# Altium PCB Estacion_Meteorologica_Feather _M0.PcbDoc
Units mil, origin at the board's own origin, x right, y up, seen from the top; angles counter-clockwise.
Board outline 2283.46 x 2987.13 mil, 4 copper layers (Top Layer, GND, VCC, Bottom Layer), stack 62.639 mil thick; 57 components, 92 nets, 233 pads, 182 vias.
Unrouted connection lines stored in the file: 1.
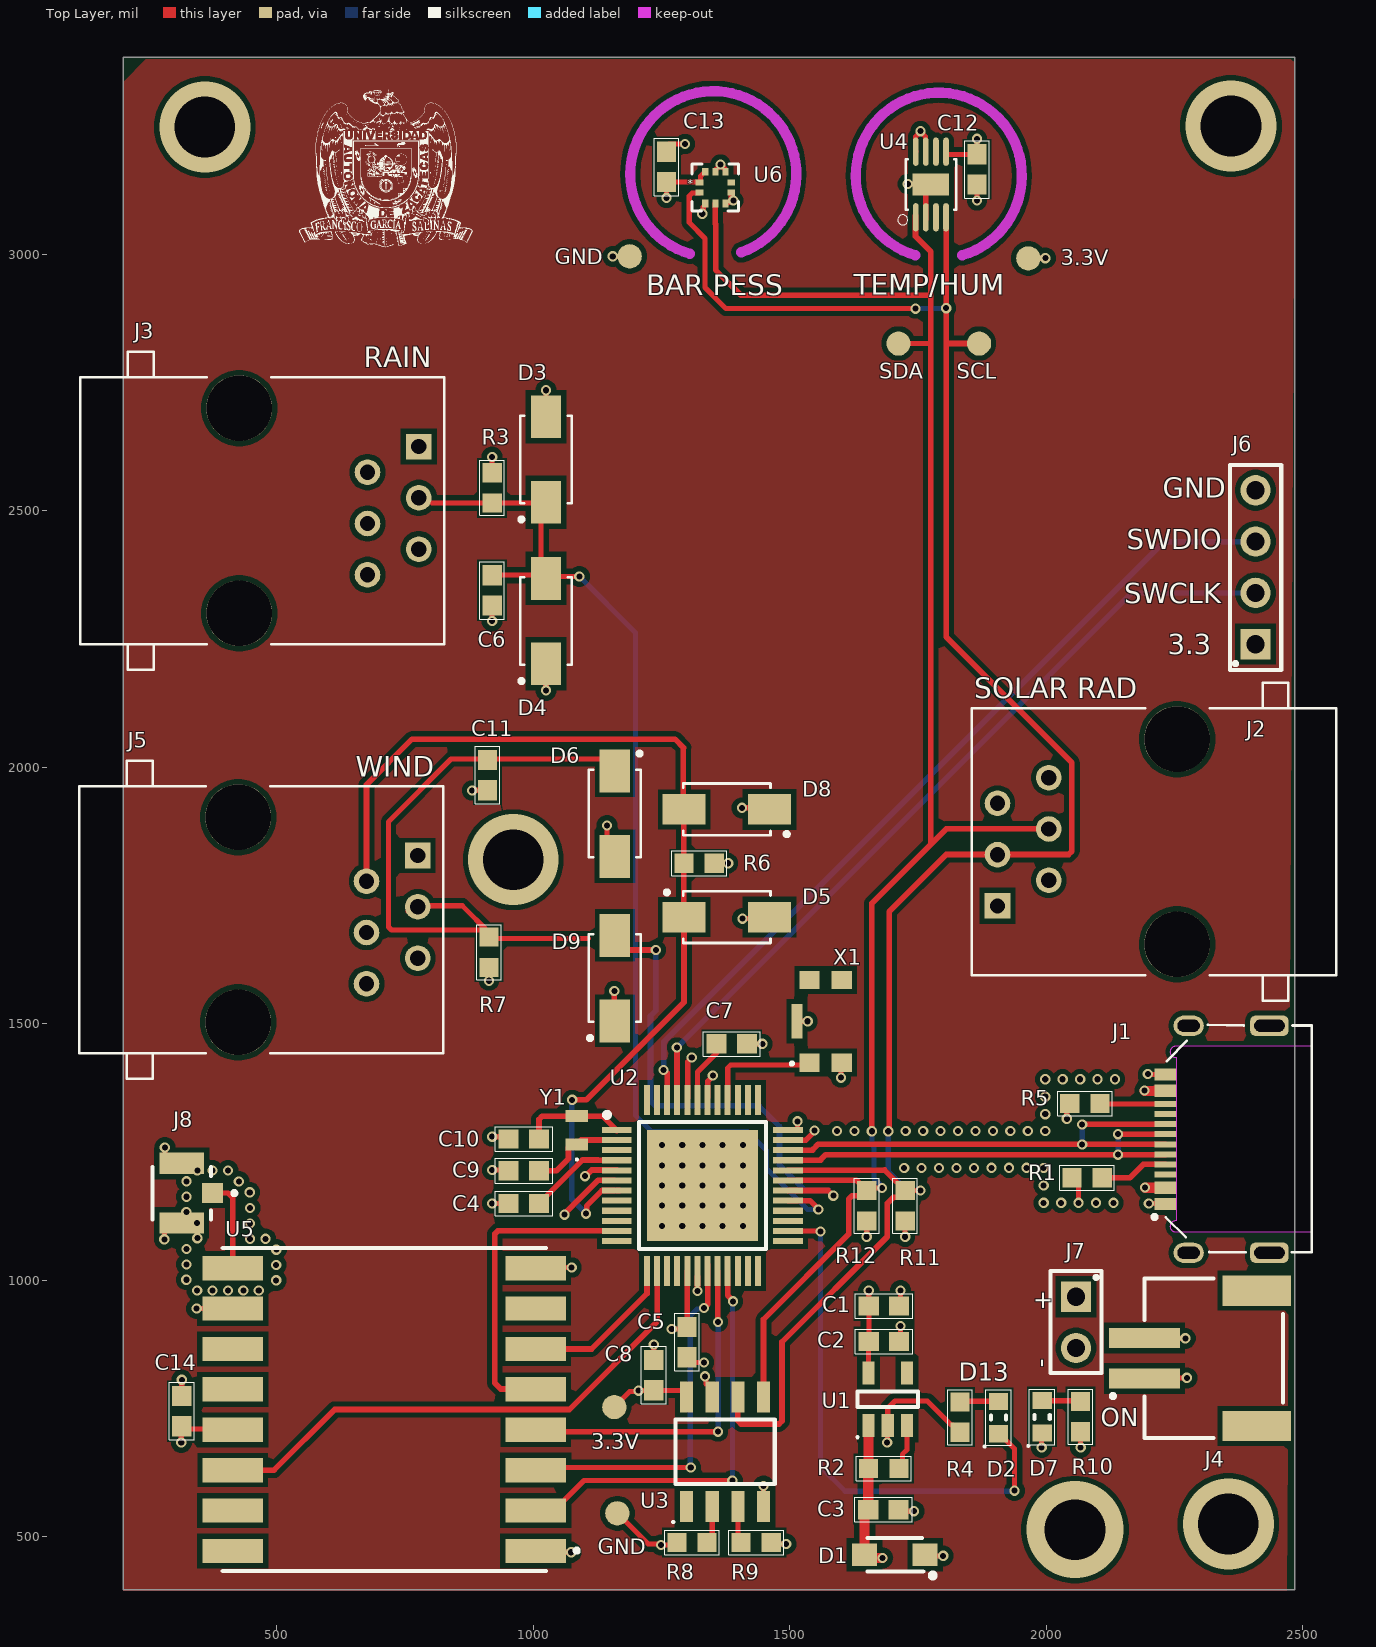
[diagram p0: Top Layer view]
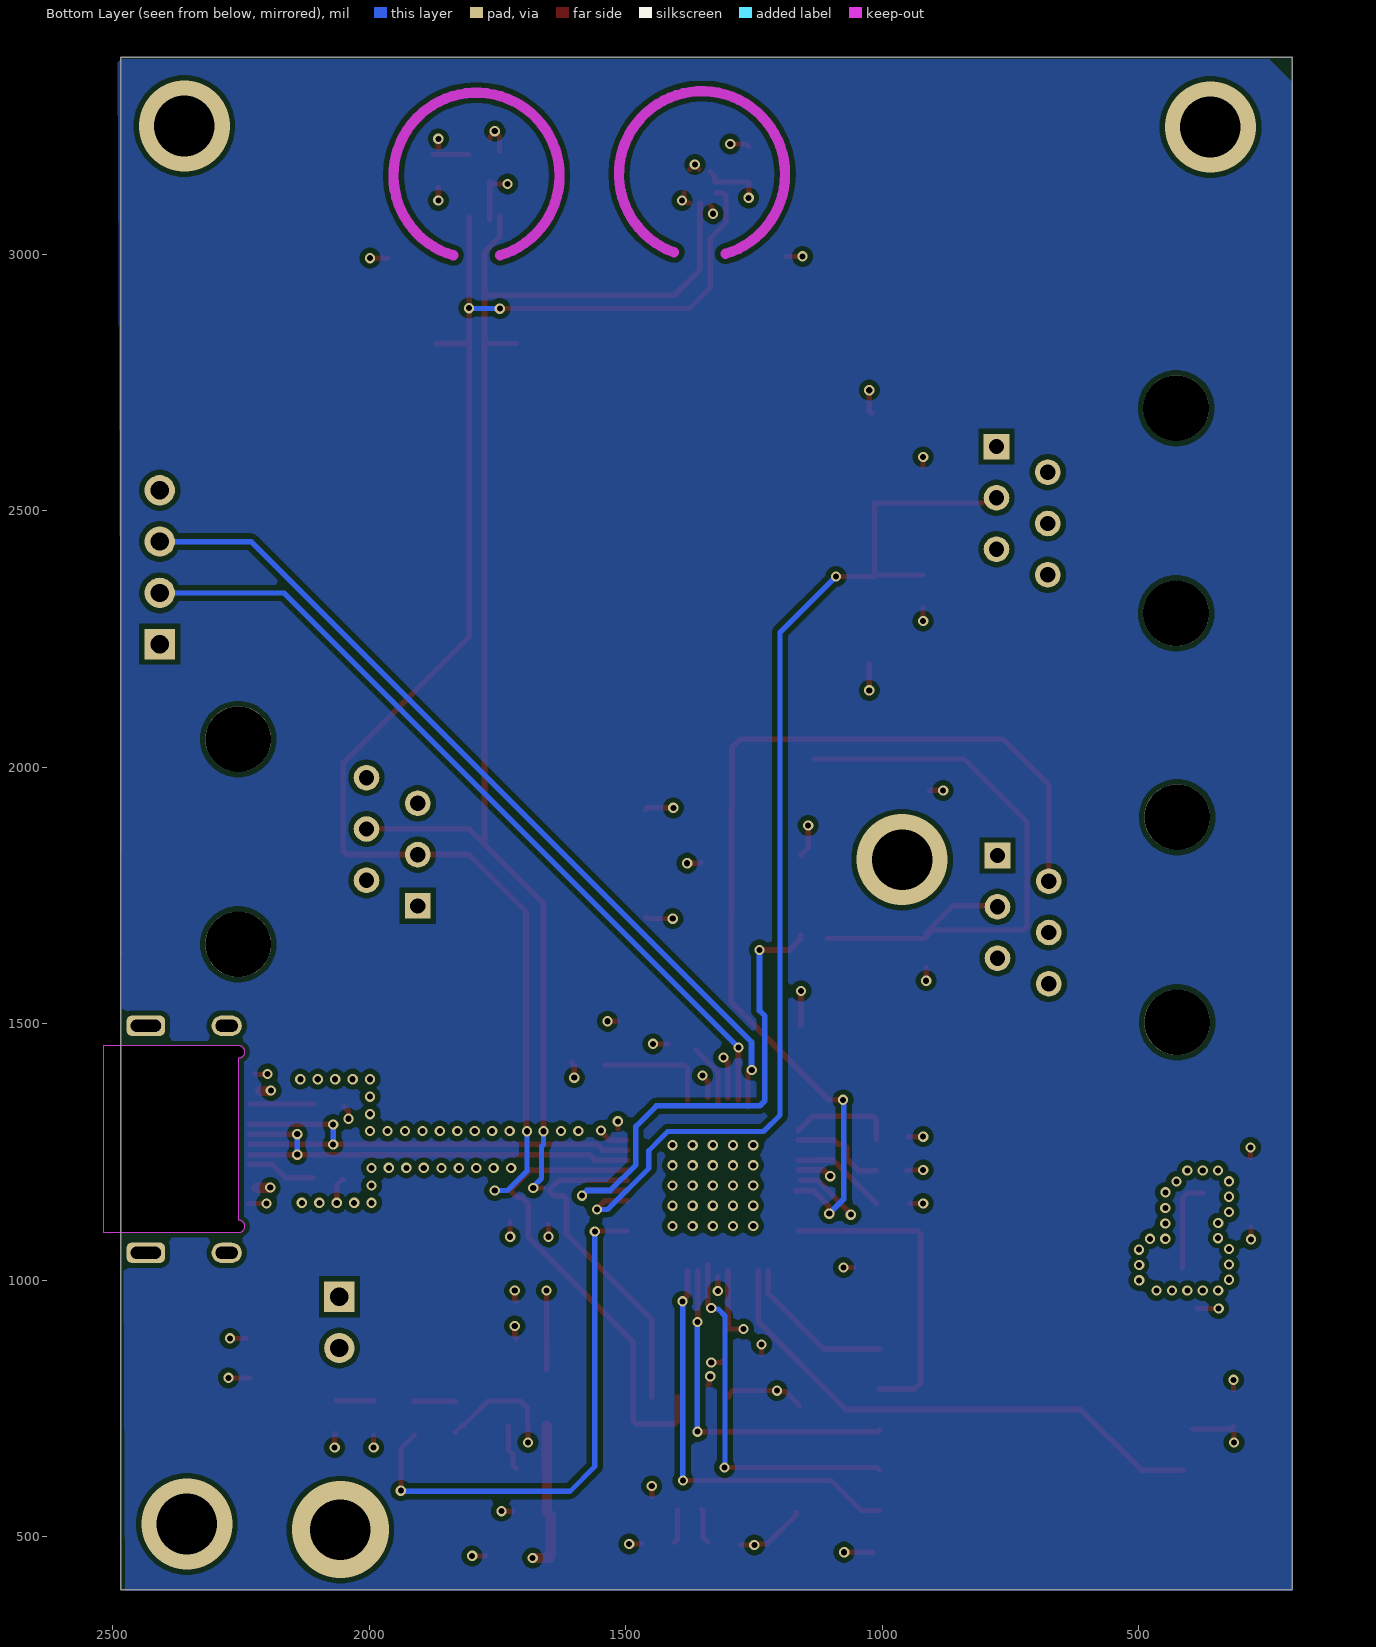
[diagram p1: Bottom Layer view, seen from below]
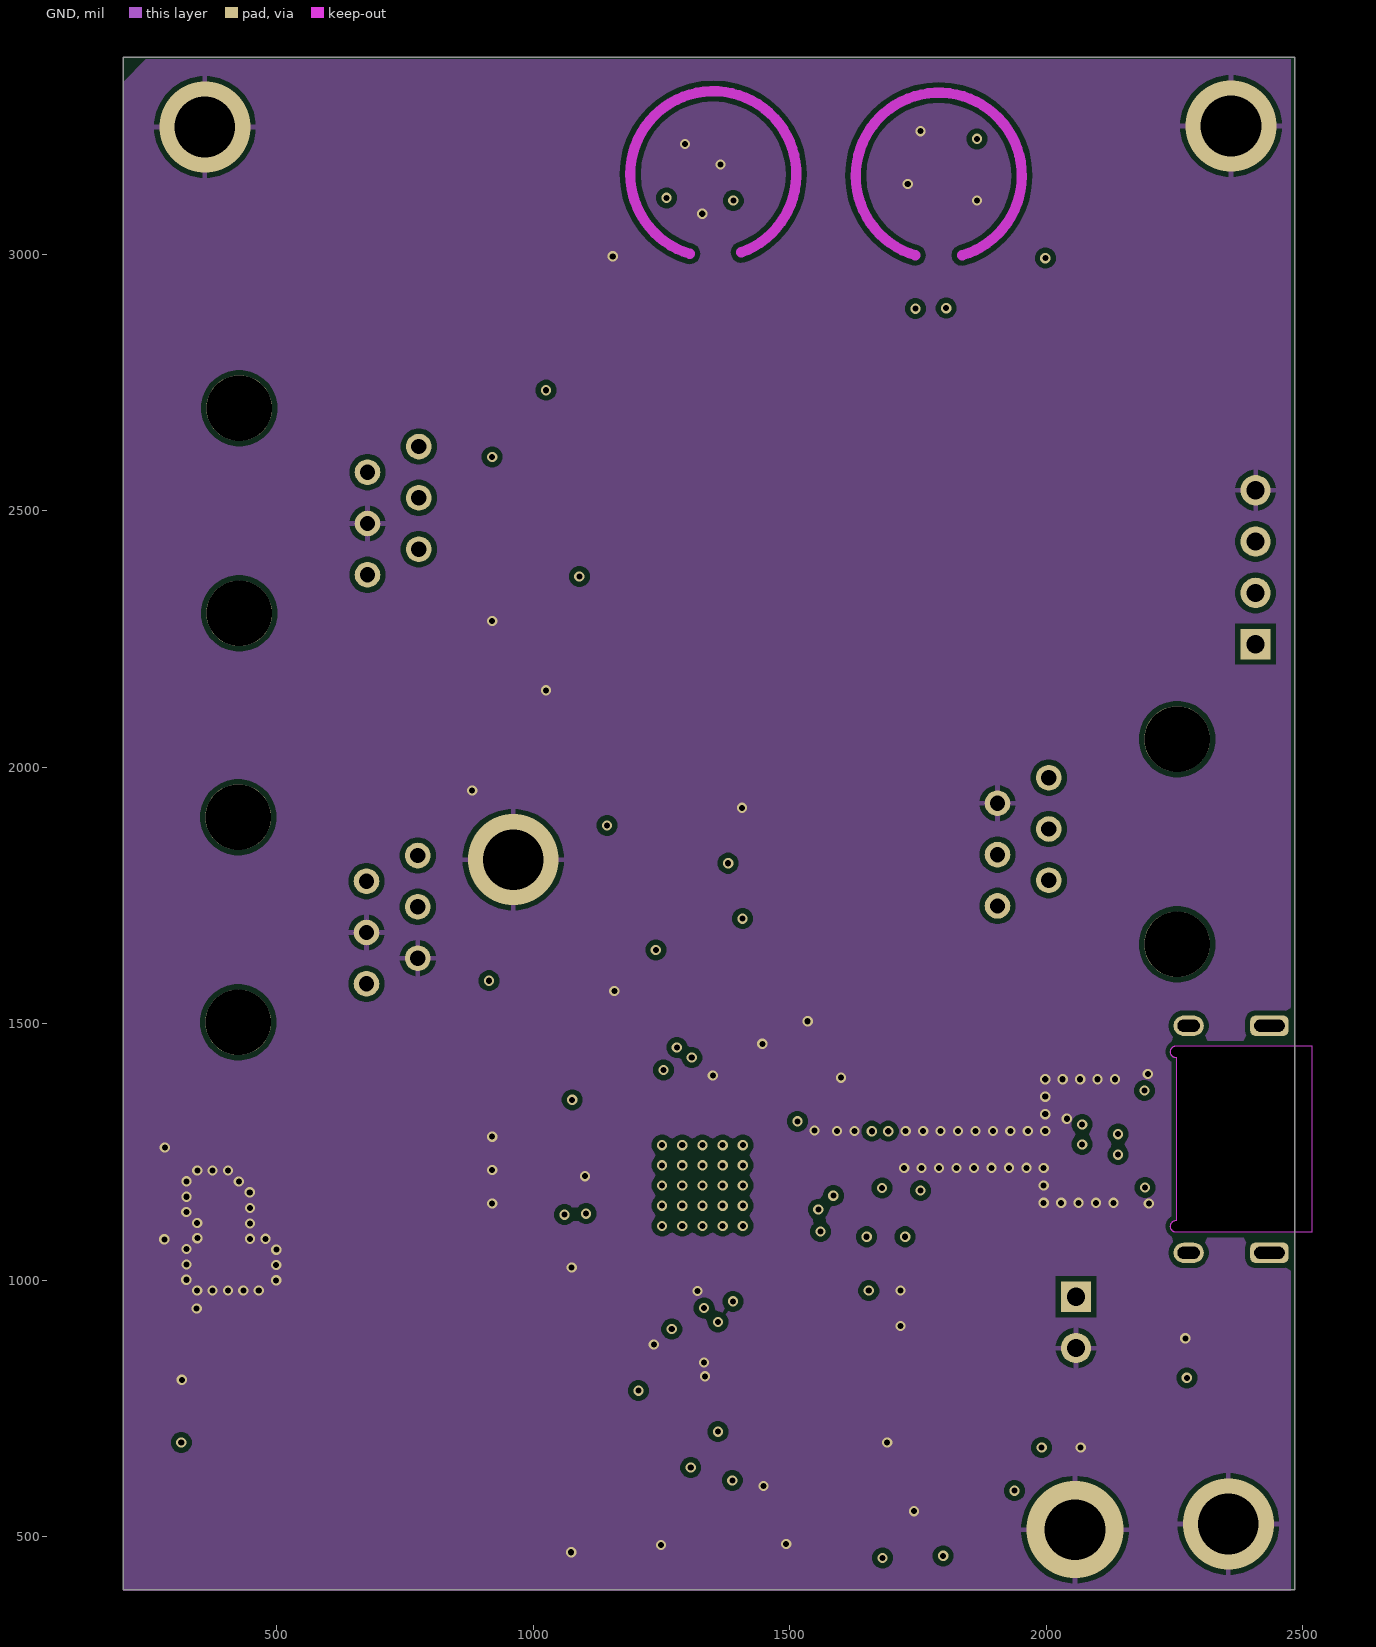
[diagram p2: GND]
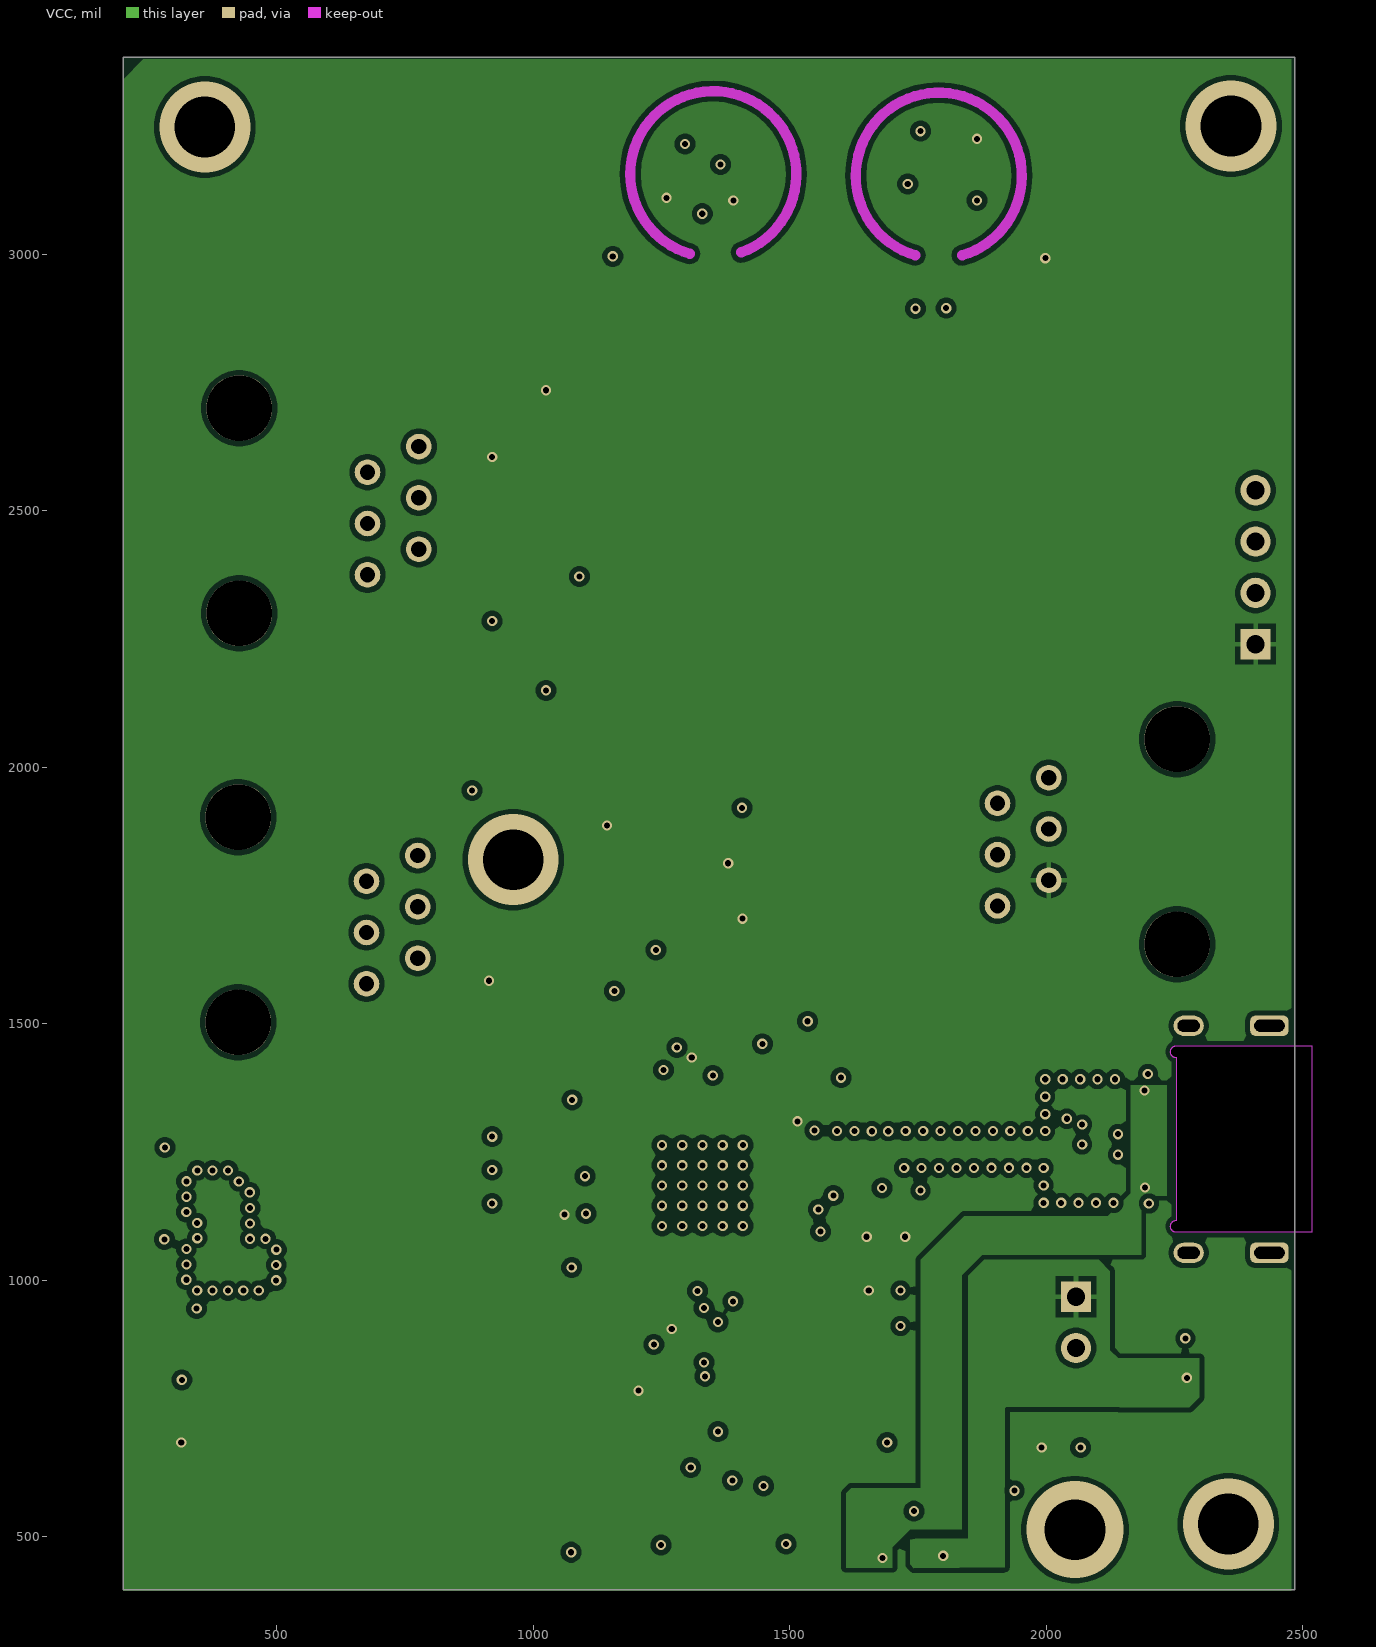
[diagram p3: VCC]
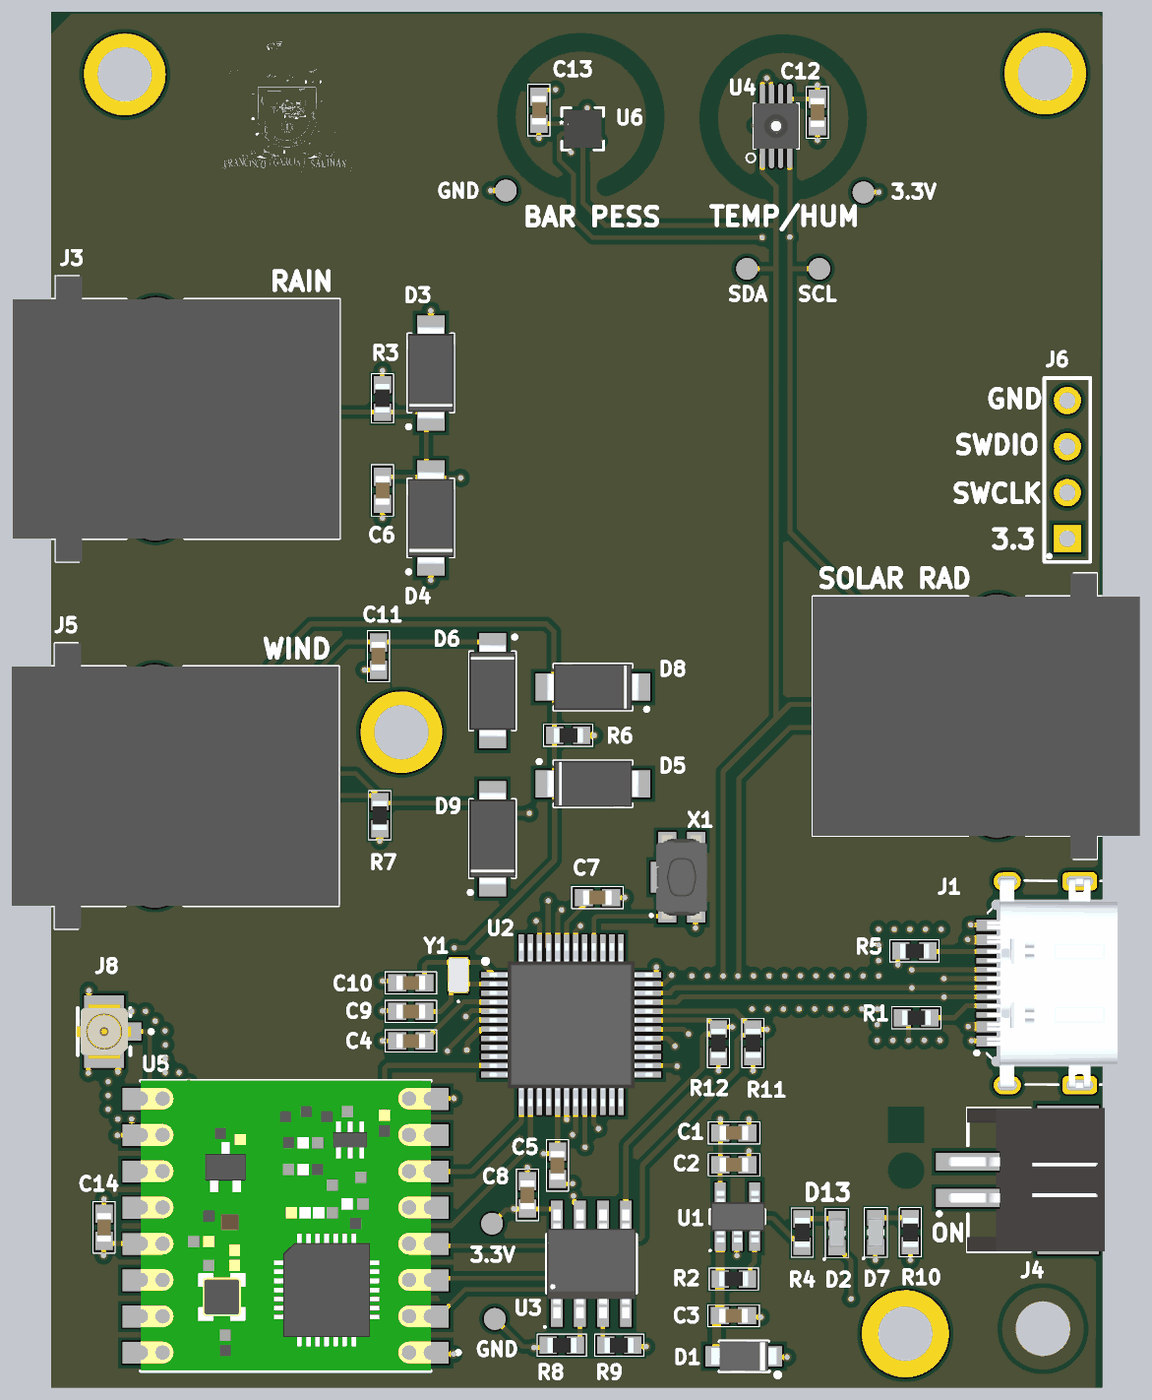
[diagram p4: 3D render of the assembled board from above, using the file's embedded part models]

## Layer stack, top to bottom
Top Solder: solder mask 0.4, Solder Resist, Dk 3.5
Top Layer: signal copper 1.378
Dielectric 2: prepreg 8.268, PP-006, Dk 4.1
GND: signal copper 0.709
Dielectric 1: core 41.929, FR-4, Dk 4.8
VCC: signal copper 0.709
Dielectric 3: prepreg 8.268, PP-006, Dk 4.1
Bottom Layer: signal copper 1.378
Bottom Solder: solder mask 0.4, Solder Resist, Dk 3.5

## Board outline
200.54,396.87 200.54,3384 2484,3384 2484,396.87

## Design rules (kind name [scope] priority, off if disabled: settings)
Clearance [All] p1: gap=10 ignorepadtopadclearanceinfootprint=FALSE
DiffPairsRouting [All] p1: maxlimit=10 minlimit=10 mostfreqgap=10 toplayer_minwidth=15 toplayer_maxwidth=15 toplayer_prefwidth=15 midlayer1_minwidth=15 midlayer1_maxwidth=15 midlayer1_prefwidth=15 midlayer2_minwidth=15 midlayer2_maxwidth=15 midlayer2_prefwidth=15 bottomlayer_minwidth=15 bottomlayer_maxwidth=15 bottomlayer_prefwidth=15 maxuncoupledlength=500
HoleSize [All] p1: absolutevalues=TRUE maxlimit=236.22 minlimit=11.81 maxpercent=80.000 minpercent=20.000
PolygonConnect [All] p1: connectstyle=Relief reliefconductorwidth=10 reliefentries=4 polygonreliefangle="90 Angle" airgapwidth=10
RoutingVias [All] p1: holewidth=28 width=50 viastyle="Through Hole" minholewidth=28 minwidth=50 maxholewidth=28 maxwidth=50
SolderMaskExpansion [All] p1: expansion=4 istentingtop=FALSE
SupplyNets "Schematic Supply Nets_8" [InNet('VLVL')] p1: voltage=0.000
SupplyNets "Schematic Supply Nets_7" [InNet('GND')] p2: voltage=0.000
SupplyNets "Schematic Supply Nets_6" [InNet('VBUSS')] p3: voltage=0.000
SupplyNets "Schematic Supply Nets_5" [InNet('VIN')] p4: voltage=0.000
SupplyNets "Schematic Supply Nets_4" [InNet('VDD3V')] p5: voltage=0.000
SupplyNets "Schematic Supply Nets_3" [InNet('+3V3')] p6: voltage=0.000
SupplyNets "Schematic Supply Nets_2" [InNet('VBATT')] p7: voltage=0.000
SupplyNets "Schematic Supply Nets_1" [InNet('VDD5V')] p8: voltage=0.000
SupplyNets "Schematic Supply Nets" [InNet('VBUS')] p9: voltage=0.000
Width [All] p1: maxlimit=20 minlimit=10 preferedwidth=10 midlayer1_maxwidth=10 midlayer2_maxwidth=10 minimp=50.000000 maximp=50.000000 favimp=50.000000
28 further rules are at their usual default settings.

## Classes and differential pairs
differential pair D: +D_P -D_N

## Components (designator, comment, footprint, x,y, rotation, side; value= is the part's Value field where it differs from the comment)
3.3V "Test_P" Test_point 1158,753 r90 top (schematic designator TP3)
3.3V "Test_P" Test_point 1965,2992 r90 top (schematic designator TP2)
C1 "10uF" CAPCP1608_0603 1683.67,950 r180 top
C2 "1uF" CAPCP1608_0603 1683.67,881 r180 top
C3 "10uF" CAPCP1608_0603 1682.67,553 r180 top
C4 "1uF" CAPCP1608_0603 981.62,1149.63 r0 top
C5 "10uF" CAPCP1608_0603 1300,879.53 r90 top
C6 "1uF" CAPCP1608_0603 920,2345 r90 top
C7 "1uF" CAPCP1608_0603 1387,1461 r0 top
C8 "0.1uF" CAPCP1608_0603 1235,815.47 r90 top
C9 "22pF" CAPCP1608_0603 981.62,1213.63 r180 top
C10 "22pF" CAPCP1608_0603 981.62,1275.63 r180 top
C11 "1uF" CAPCP1608_0603 911,1985 r90 top
C12 "0.1uF" CAPCP1608_0603 1865,3165.47 r90 top
C13 "0.1uF" CAPCP1608_0603 1260,3170.47 r270 top
C14 "10uF" CAPCP1608_0603 315,745 r270 top
D1 "MBR120" SODFL3616X98N 1705,465 r180 top
D2 "RED" DIODO_0603 1907,732.5 r90 top
D3 "SMAJ10A" DIOM4325X250N 1025,2600 r90 top
D4 "SMAJ10A" DIOM4325X250N 1025,2285 r90 top
D5 "SMAJ10A" DIOM4325X250N 1377.27,1708 r0 top
D6 "SMAJ10A" DIOM4325X250N 1159,1909.73 r270 top
D7 "ON" DIODO_0603 1992,734 r90 top
D8 "SMAJ10A" DIOM4325X250N 1377.27,1918 r180 top
D9 "SMAJ10A" DIOM4325X250N 1159,1589 r90 top
GND "Test_P" Test_point 1164,546 r90 top (schematic designator TP5)
GND "Test_P" Test_point 1188,2996 r90 top (schematic designator TP4)
J1 "UJ20-C-H-G-MSMT-1-P16-TR" uJ20-C-H-G-MSMT-1-P16-TR 2435,1275 r90 top
J2 "RJ11-6N-BH1750" TE_RJ11-6N-B 1905,1729.8 r180 top
J3 "RJ11-6N-RAIN" TE_RJ11-6N-B 777,2625.2 r0 top
J4 "1769" 1769_Conector_Bateria 2191.5,848.11 r90 top
J5 "RJ11-6N-WIND" TE_RJ11-6N-B 775,1828 r0 top
J6 "Connector-Debug" HDR1X4 2407,2290 r90 top
J7 "Energy" HDR1X2_2 1877,179 r0 top locked
J8 "Antena" SAMTEC_RSP-122811-01 315,1170 r90 top
R1 "5.1K" RESC1608_0603 2080,1200 r0 top
R2 "100K" RESC1608_0603 1682.67,633 r180 top
R3 "100K" RESC1608_0603 920,2545.06 r90 top
R4 "470R" RESC1608_0603 1832,734 r90 top
R5 "5.1K" RESC1608_0603 2076,1345 r0 top
R6 "10K" RESC1608_0603 1324,1813 r0 top
R7 "100K" RESC1608_0603 914,1638.94 r270 top
R8 "10K" RESC1608_0603 1310,489 r0 top
R9 "10K" RESC1608_0603 1434,489 r180 top
R10 "2.2K" RESC1608_0603 2067,733.94 r270 top
R11 "4.7K" RESC1608_0603 1725,1144.94 r270 top
R12 "4.7K" RESC1608_0603 1650,1144.94 r270 top
SCL "Test_P" Test_point 1869,2826 r90 top (schematic designator TP12)
SDA "Test_P" Test_point 1712,2826 r90 top (schematic designator TP1)
U1 "AP2112K-3.3" SOT-23-5 1691.87,767.88 r90 top
U2 "ATSAMD21G18A-AU" QFP-48N 1329.85,1184.84 r0 top
U3 "AT24CM01-SSHD-T" SOIC-8N 1373.87,665.74 r90 top
U4 "SHT31" SON50P250X250X90-9T110X180N 1775.16,3136.02 r90 top
U5 "RFM69HCW" COM-13909 709.72,748.15 r180 top locked
U6 "BMP390" 10LGA_2X2X0p75_BOS-M 1360,3135 r90 top
X1 "KMR223GLFG" KMR223GLFG_Boton 1570,1505 r90 top
Y1 "32.7680kHz" "XTAL 830050789" 1084.2,1292.36 r90 top

## Footprints (in the part's own frame and the unit in brackets; to place one, negate y for a bottom-side part, rotate by r counter-clockwise, add the part's x,y. Pads: shape width x height; smd on the part's side, far side on the other; paste and mask are expansions set on the pad)
10LGA_2X2X0p75_BOS-M [mil]
  rect 12x15 smd paste+0 mask+0: 1(4.84,36) 2(-14.84,36) 6(-14.84,-26) 7(4.84,-26)
  rect 15x12 smd paste+0 mask+0: 3(-36,24.68) 4(-36,5) 5(-36,-14.68) 8(26,-14.68) 9(26,5) 10(26,24.68)
  silkscreen extent -51,-40 41,50, body extent -46,-36 36,46, height 32
1769_Conector_Bateria [mm]
  rect 1x3.5 smd: 1(-1,0) 2(1,0)
  rect 1.5x3.4 smd: 3(-3.35,-5.55) 4(3.35,-5.55)
  silkscreen extent -3.95,-6.85 3.95,1.67, body extent -3.95,-7.57 3.95,1.03, height 4.8
CAPCP1608_0603 [mm] "Chip Capacitor, 2-Leads, Body 1.60x0.80mm, IPC Medium Density"
  rect 1x0.95 smd: 1(-0.75,0) 2(0.75,0)
  silkscreen extent -1.42,-0.61 1.42,0.61, body extent -0.8,-0.4 0.8,0.4, height 0.9
COM-13909 [mm]
  rect 3x1.2 smd: 1(-7.5,7) 2(-7.5,5) 3(-7.5,3) 4(-7.5,1) 5(-7.5,-1) 6(-7.5,-3) 7(-7.5,-5) 8(-7.5,-7) 9(7.5,-7) 10(7.5,-5) 11(7.5,-3) 12(7.5,-1) 13(7.5,1) 14(7.5,3) 15(7.5,5) 16(7.5,7)
  silkscreen extent -9.62,-8 8,8, body extent -8.01,-8.02 7.99,7.98, height 1.8
DIODO_0603 [mm]
  rect 0.85x0.95 smd: 1(-0.8,0) 2(0.8,0)
  silkscreen extent -1.49,-0.64 1.37,0.74, body extent -0.8,-0.43 0.8,0.43, height 0.8
DIOM4325X250N [mm]
  rect 2.12x1.5 smd: 1(-2.115,0) 2(2.115,0)
  silkscreen extent -3.07,-1.28 2.16,1.32, body extent -2.57,-1.28 2.57,1.28, height 2.5
HDR1X2_2 [mm]
  rect 1.5x1.5 hole 0.9: 1(4.597,20.041)
  round 1.5 hole 0.9: 2(4.597,17.501)
  silkscreen extent 3.33,16.26 5.87,21.31, body extent -25.88,6.07 7.14,47.24
HDR1X4 [mm]
  rect 1.5x1.5 hole 0.9: 1(-1.27,-0.025)
  round 1.5 hole 0.9: 2(1.27,-0.025) 3(3.81,-0.025) 4(6.35,-0.025)
  silkscreen extent -2.54,-1.3 7.59,1.24
KMR223GLFG_Boton [mm]
  rect 0.9x1 smd: 1(-2.05,0.8) 2(-2.05,-0.8) 3(2.05,-0.8) 4(2.05,0.8)
  rect 1.7x0.55 smd: G1(0,1.424)
  silkscreen extent -2.15,1.62 -2.05,1.72, body extent -2.3,-1.4 2.3,1.4, height 1.92
QFP-48N [mm]
  rect 1.475x0.3 smd: 1(-4.238,2.75) 2(-4.238,2.25) 3(-4.238,1.75) 4(-4.238,1.25) 5(-4.238,0.75) 6(-4.238,0.25) 7(-4.238,-0.25) 8(-4.238,-0.75) 9(-4.238,-1.25) 10(-4.238,-1.75) 11(-4.238,-2.25) 12(-4.238,-2.75) 25(4.238,-2.75) 26(4.238,-2.25) 27(4.238,-1.75) 28(4.238,-1.25) 29(4.238,-0.75) 30(4.238,-0.25) 31(4.238,0.25) 32(4.238,0.75) 33(4.238,1.25) 34(4.238,1.75) 35(4.238,2.25) 36(4.238,2.75)
  rect 0.3x1.475 smd: 13(-2.75,-4.238) 14(-2.25,-4.238) 15(-1.75,-4.238) 16(-1.25,-4.238) 17(-0.75,-4.238) 18(-0.25,-4.238) 19(0.25,-4.238) 20(0.75,-4.238) 21(1.25,-4.238) 22(1.75,-4.238) 23(2.25,-4.238) 24(2.75,-4.238) 37(2.75,4.238) 38(2.25,4.238) 39(1.75,4.238) 40(1.25,4.238) 41(0.75,4.238) 42(0.25,4.238) 43(-0.25,4.238) 44(-0.75,4.238) 45(-1.25,4.238) 46(-1.75,4.238) 47(-2.25,4.238) 48(-2.75,4.238)
  rect 5.5x5.5 smd: 49(0,0)
  silkscreen extent -4.85,-3.15 3.15,3.62, body extent -4.5,-4.5 4.5,4.5, height 1.2
RESC1608_0603 [mm]
  rect 0.95x0.95 smd: 1(-0.763,0) 2(0.737,0)
  silkscreen extent -1.37,-0.61 1.35,0.61, body extent -0.8,-0.4 0.8,0.4, height 0.45
SAMTEC_RSP-122811-01 [mm]
  rect 1x1.05 smd: 1(0,-1.525)
  rect 1.05x2.2 smd: G1(-1.475,0) G2(1.475,0)
  silkscreen extent -1.3,-2.7 1.3,1.45, body extent -1.5,-1.51 1.5,1.49, height 1.35
SODFL3616X98N [mm]
  rect 1.24x1.12 smd: 1(-1.5,0) 2(1.5,0)
  silkscreen extent -1.99,-0.82 1.35,1.14, body extent -1.8,-0.83 1.8,0.82, height 0.98
SOIC-8N [mm]
  rect 1.525x0.65 smd: 1(-2.712,1.905) 2(-2.712,0.635) 3(-2.712,-0.635) 4(-2.712,-1.905) 5(2.712,-1.905) 6(2.712,-0.635) 7(2.712,0.635) 8(2.712,1.905)
  silkscreen extent -3.48,-2.46 1.6,2.58, body extent -3,-2.46 3,2.44, height 1.75
SON50P250X250X90-9T110X180N [mm]
  oval 1.4x0.282 smd: 1(-1.625,0.75) 2(-1.625,0.25) 3(-1.625,-0.25) 4(-1.625,-0.75) 5(1.625,-0.75) 6(1.625,-0.25) 7(1.625,0.25) 8(1.625,0.75)
  rect 1.1x1.8 smd: 9(0,0)
  silkscreen extent -2,-1.25 1.25,1.64, body extent -1.25,-1.25 1.25,1.25, height 0.9
SOT-23-5 [mm]
  rect 1.15x0.6 smd: 1(-1.292,0.97) 2(-1.292,0.02) 3(-1.292,-0.93) 4(1.308,-0.93) 5(1.308,0.97)
  silkscreen extent -1.87,-1.48 0.38,1.52, body extent -1.42,-1.51 1.43,1.49, height 1.4
TE_RJ11-6N-B [mm]
  rect 1.268x1.268 / inner round 1.268 / far side rect 1.268x1.268 hole 0.76: 1(0,0)
  round 1.268 hole 0.76: 2(-2.54,-1.27) 3(0,-2.54) 4(-2.54,-3.81) 5(0,-5.08) 6(-2.54,-6.35)
  round 3.25 hole 3.25 unplated: ""(-8.89,1.9) ""(-8.89,-8.26)
  silkscreen extent -16.76,-11.05 1.27,4.7, body extent -16.76,-11.05 1.27,4.7, height 12.57
Test_point [mm]
  round 1.2 smd: 1(0,0)
uJ20-C-H-G-MSMT-1-P16-TR [mm]
  rect 0.6x1.1 smd: A1_B12(-3.2,5.15) A4_B9(-2.4,5.15) A12_B1(3.2,5.15) B4_A9(2.4,5.15)
  rect 0.3x1.1 smd: A5(-1.25,5.15) A6(-0.25,5.15) A7(0.25,5.15) A8(1.25,5.15) B5(1.75,5.15) B6(0.75,5.15) B7(-0.75,5.15) B8(-1.75,5.15)
  oval 1x1.5 hole 0.6 slot 1.1 at 90 deg: SH1(-5.62,4) SH3(5.62,4)
  rrect50% 1x1.9 hole 0.6 slot 1.5 at 90 deg: SH2(-5.62,0) SH4(5.62,0)
  Keep-Out Layer board cut-out: 4.628,-2.1 -4.612,-2.1 -4.612,4.6 -4.612,4.616 -4.61,4.631 -4.608,4.647 -4.605,4.662 -4.602,4.678 -4.597,4.693 -4.592,4.708 -4.586,4.722 -4.579,4.736 -4.572,4.75 -4.564,4.763 -4.555,4.776 -4.545,4.789 -4.535,4.801 -4.524,4.812 -4.513,4.823 -4.501,4.833 -4.488,4.843 -4.475,4.852 -4.462,4.86 -4.448,4.867 -4.434,4.874 -4.42,4.88 -4.405,4.885 -4.39,4.89 -4.374,4.893 -4.359,4.896 -4.343,4.898 -4.328,4.9 -4.312,4.9 -4.296,4.9 -4.281,4.898 -4.265,4.896 -4.25,4.893 -4.234,4.89 -4.219,4.885 -4.204,4.88 -4.19,4.874 -4.176,4.867 -4.162,4.86 -4.149,4.852 -4.136,4.843 -4.123,4.833 -4.111,4.823 -4.1,4.812 -4.089,4.801 -4.079,4.789 -4.069,4.776 -4.06,4.763 -4.052,4.75 -4.045,4.736 -4.038,4.722 -4.032,4.708 -4.027,4.693 -4.022,4.678 -4.019,4.662 -4.016,4.647 -4.014,4.631 -4.012,4.616 -4.012,4.6 4.028,4.6 4.028,4.616 4.03,4.631 4.032,4.647 4.035,4.662 4.038,4.678 4.043,4.693 4.048,4.708 4.054,4.722 4.061,4.736 4.068,4.75 4.076,4.763 4.085,4.776 4.095,4.789 4.105,4.801 4.116,4.812 4.127,4.823 4.139,4.833 4.152,4.843 4.165,4.852 4.178,4.86 4.192,4.867 4.206,4.874 4.22,4.88 4.235,4.885 4.25,4.89 4.266,4.893 4.281,4.896 4.297,4.898 4.312,4.9 4.328,4.9 4.344,4.9 4.359,4.898 4.375,4.896 4.39,4.893 4.406,4.89 4.421,4.885 4.436,4.88 4.45,4.874 4.464,4.867 4.478,4.86 4.491,4.852 4.504,4.843 4.517,4.833 4.529,4.823 4.54,4.812 4.551,4.801 4.561,4.789 4.571,4.776 4.58,4.763 4.588,4.75 4.595,4.736 4.602,4.722 4.608,4.708 4.613,4.693 4.618,4.678 4.621,4.662 4.624,4.647 4.626,4.631 4.628,4.616 4.628,4.6
  silkscreen extent -5.59,-2.1 5.66,5.79, body extent -5.77,-2.09 5.77,5.11, height 2.59
"XTAL 830050789" [mm]
  rect 0.6x1.1 smd: 1(-0.695,-0.02) 2(0.705,-0.02)
  silkscreen extent -1.49,-0.07 -1.39,0.03, body extent -0.99,-0.63 1.01,0.57, height 0.55

## Part data
3.3V 3.3V GND GND SCL SDA: library part Test_point
C1 C3 C5 C14: library part C0603X100J1GACAUTO, "Capacitor_10uF_0603"
C2 C4 C6 C7 C11: library part C0603X105J4RACTU, "Capacitor_1uF_0603"
C8 C12 C13: library part 06035C104K4T4A, "Capacitor_0.1uF_0603"
C9 C10: library part C0603C220J1GAC, "Capacitor_22pF_0603"
D1: library part MBR120ESFT3G, "Diodo_Zenner_Sod-123FL-2"
D2 D7: library part SML-D12D1WT86, "LED_NARANJA_0603"
D3 D4 D5 D6 D8 D9: "TVS Diode 10V 400W Unidirectional SMAJ10A (DO-214AC)"
J1: "Conector usb c", Package=None, Availability=Unavailable, MP=UJ20-C-H-G-MSMT-1-P16-TR, Price=None
J2 J3 J5: library part RJ11-6N-B, "6 Position 1 Port Right Angle RJ11 Low Profile Filtered EMI/RFI Modular Jack", Package=None, Availability="In Stock", Check_prices=https://www.snapeda.com/parts/RJ11-6N-B/TE+Connectivity+Corcom+Filters/view-part/?ref=eda, MF="TE Connectivity", MP=RJ11-6N-B, Price=None, Purchase-URL=https://pricing.snapeda.com/search/part/RJ11-6N-B/?ref=eda, SnapEDA_Link=https://www.snapeda.com/parts/RJ11-6N-B/TE+Connectivity+Corcom+Filters/view-part/?ref=snap
J4: "Adafruit Accessories JST-PH 2-pin SMT Right Angle Connect", Manufacturer_Name=Adafruit, Mouser Part Number=485-1769, Datasheet Link=https://cdn-shop.adafruit.com/datasheets/17311.pdf, Geometry.Height=5.5mm, Manufacturer_Part_Number=1769, Mouser Price/Stock=https://www.mouser.co.uk/ProductDetail/Adafruit/1769?qs=GURawfaeGuBbgoGtf2XstA%3D%3D
J6: library part Connector_04_debug
J7: library part Connector_energy, "Conector de gestor de carga"
J8: library part RSP-122811-01, "U.FL (UMCC), IPEX MHF1 Connector Receptacle, Male Pin 50Ohm Surface Mount Solder", Package=None, Availability=Unavailable, MP=RSP-122811-01, Price=None
R1 R5: library part RCA06035K10JNEA, "Resistencia_5.1K_0603"
R2 R3 R7: library part RCA0603100KFKEAHP, "Resistencia_100K_0603"
R4: library part RCA0603470RFKEA, "Resistencia_470R_0603"
R6 R8 R9: library part RCA060310K0JNEA, "Resistencia_10K_0603"
R10: library part RCA06032K21FKTA, "Resistencia_2.2K_0603"
R11 R12: library part RCA06034K70FKEA, "Resistencia_4.7K_0603"
U1: library part AP2112K-3.3TRG1, "600mA 3.3V LDO Regulator Enable SOT23-5 DiodesZetex AP2112K-3.3TRG1, LDO Voltage Regulator, 3.3 V +/-1.5%, 2.5  6 Vin, 5-Pin SOT-23", Manufacturer_Name="Diodes Incorporated", Mouser Part Number=621-AP2112K-3.3TRG1, Datasheet Link=https://www.diodes.com//assets/Datasheets/AP2112.pdf, Geometry.Height=1.4mm, Manufacturer_Part_Number=AP2112K-3.3TRG1, Mouser Price/Stock=https://www.mouser.co.uk/ProductDetail/Diodes-Incorporated/AP2112K-3.3TRG1?qs=x6A8l6qLYDDPYHosCdzh%2FA%3D%3D
U2: "ARM Microcontrollers - MCU 256KB 32KB 48TQFP GRN1.6-3.6V48MHz", Manufacturer_Name=Microchip, Mouser Part Number=556-ATSAMD21G18A-AU, Datasheet Link=https://datasheet.lcsc.com/lcsc/1810010234_Microchip-Tech-ATSAMD21G18A-AU_C78624.pdf, Geometry.Height=1.2mm, Manufacturer_Part_Number=ATSAMD21G18A-AU, Mouser Price/Stock=https://www.mouser.co.uk/ProductDetail/Microchip-Technology/ATSAMD21G18A-AU?qs=KLFHFgXTQiDh1vL0VLU76Q%3D%3D
U3: "EEPROM SERIAL EEPROM, 1M 2-WIR-8 SOIC", Manufacturer_Name=Microchip, Mouser Part Number=556-AT24CM01-SSHD-T, Datasheet Link=https://4donline.ihs.com/images/VipMasterIC/IC/ATML/ATML-S-A0000726505/ATML-S-A0000726505-1.pdf?hkey=EF798316E3902B6ED9A73243A3159BB0, Geometry.Height=1.75mm, Manufacturer_Part_Number=AT24CM01-SSHD-T, Mouser Price/Stock=https://www.mouser.co.uk/ProductDetail/Microchip-Technology/AT24CM01-SSHD-T?qs=s44pgLhgXQig9Z6HBeFbBg%3D%3D
U4: "Humidity Temperature Sensor 0 ~ 100% RH Analog Voltage Â±2% RH 8s Surface Mount", Package="VFDFN-8 Sensirion AG", Availability="In Stock", Check_prices=https://www.snapeda.com/parts/SHT31/Sensirion+AG/view-part/?ref=eda, MF="Sensirion AG", MP=SHT31, Price=None, Purchase-URL=https://pricing.snapeda.com/search/part/SHT31/?ref=eda, SnapEDA_Link=https://www.snapeda.com/parts/SHT31/Sensirion+AG/view-part/?ref=snap
U5: library part COM-13909, "Rfm69hcw Wireless Transceiver 91", Package=None, Availability=Unavailable, MP=COM-13909, Price=None
U6: "Barometric Pressure Sensor, I2C/SPI, 300-1250 hPa", Mfr_Name="Bosch Sensortec", RefDes=RefDes, Type=Type
X1: library part KMR223GLFG_1, "Tactile Switch SPST-NO Top Actuated Surface Mount", Manufacturer_Name="C & K COMPONENTS", Mouser Part Number=611-KMR223GLFG, Datasheet Link=https://www.ckswitches.com/media/1479/kmr2.pdf, Geometry.Height=1.9mm, Manufacturer_Part_Number=KMR223GLFG, Mouser Price/Stock=https://www.mouser.co.uk/ProductDetail/CK/KMR223GLFG?qs=sb%252But3Lm4x2f%252B935G%252B3m6Q%3D%3D
Y1: library part 830050789, "XTAL 32.7680kHz 20ppm 2.0 x 1.2mm"

## Via types
v1: diameter 20, hole 11.81, Top Layer to Bottom Layer, tented both sides, 152 vias
v2: diameter 20, hole 11.81, Top Layer to Bottom Layer, 25 vias
v3: diameter 177.17, hole 118.11, Top Layer to Bottom Layer, 4 vias
v4: diameter 188.98, hole 118.11, Top Layer to Bottom Layer, 1 vias

## Nets (pads, with @x,y where several pads share a name; then routed paths per layer and width w, separated by ;. In a path a pad name is that pad's centre, name@x,y a point inside that pad or via, vN(x,y) a via of type N, cw(c..) or ccw(c..) an arc to the next point about the centre after c; other vN are vias at no path point)
+3V3: 3.3V.1 C1.2 C2.2 C5.2 C8.1 C12.2 C13.2 C14.2 D3.2 D5.2 D6.2 D7.1 J2.2 J6.1 R3.2 R6.2 R7.2 R11.2 R12.2 U1.5 U2.6 U2.17 U2.36 U2.44 U3.8 U4.5 U5.13 U6.1 U6.5 U6.6 U6.10 | length 1357
  Top Layer w10: v1(314,684) 314,703 C14.2@316,705 ; C14.2 320.47,710 U5.13@395,710 ; v1(914,1584) R7.2 ; R3.2@920,2585 v1(920,2605) ; D3.2@1020,2690 1025,2695 v1(1025,2735) ; v1(1144,1886.73) 1144,1843 D6.2@1159,1828 ; 3.3V.1@1162,755 1162,757 1188.09,783.09 1203.09,783.09 v1(1205,785) C8.1@1230,785 ; C8.1@1235,785 1291.07,785 1298.87,777.2 U3.8 ; v1(1260,3110) C13.2@1260,3140 ; C13.2@1263.84,3141.16 1326.16,3141.16 1326.16,3152.16 1334,3160 1334.32,3160 U6.10 ; v1(1270,905) C5.2@1300,905 ; R6.2@1353.4,1813.4 1353.8,1813 1379.2,1813 v1@1379.6,1813.4 ; U6.5@1375,3100 1380,3100 1386,3106 U6.6 ; v1@1408.4,1705.4 1408.8,1705 1457.54,1705 D5.2 ; U2.36@1515,1295 v1(1515,1310) ; v1(1650,1085) R12.2@1650,1110 ; v1(1654,980) 1654,950.02 1654.14,949.88 C2.2 1653.67,880.53 1653.67,826.33 U1.5@1655,825 ; v1(1725,1085) R11.2@1725,1115 ; U4.5@1805,3194.67 1875.33,3194.67 C12.2@1875.47,3194.53 ; C12.2@1865,3205 v1(1865,3225) ; 3.3V.1@1964,2992 1964.25,2992.25 1998.01,2992.25 v1(1998.26,2992.5) ; v1(1991,674) D7.1@1991,698
  Top Layer w11: v1@1060.5,1129.5 1126.16,1195.16 U2.6@1158.15,1195.16 ; C5.2@1300.47,910 U2.17@1300.47,1018.15 ; U2.44@1300.93,1356.02 1300.93,1425.93 v1@1308,1433
  other v1: 1061,1128 1309.05,1434.19 1408,1705 1380,1813 1389.98,3104.58
AREF: C4.2 U2.4 | length 187.3
  Top Layer w11: C4.2 1096.02,1234.5 1126.4,1234.5 1126.69,1234.21 U2.4@1163.15,1234.21
BUSY: 
"D3 IRQ": U2.14 U5.14 | length 1045.6
  Top Layer w11: U5.14 494.68,630.04 613.04,748.4 1070.48,748.4 1241.42,919.34 U2.14@1241.42,1018.15
"D4 RST": U2.13 U5.6 | length 305.4
  Top Layer w11: U5.6 1113.88,866.26 1221.73,974.11 U2.13@1221.73,1018.15
"D8 CS": U2.11 U5.5 | length 616.3
  Top Layer w11: U5.5 1004.32,788.2 936.8,788.2 925,800 925,1090.56 930.86,1096.42 U2.11@1163.15,1096.42
D13: D2.1 U2.26 | length 1038.2
  Top Layer w10: U2.26@1496.85,1096.42 v1@1560,1096.42 ; D2.1@1912,697.98 1938,671.98 v1(1938,590)
  Bottom Layer w10: v1(1560,1095) 1560,637 1608,589 1937,589 v1(1938,590)
D_N: J1.A7 J1.B7 U2.33 | length 872.3
  Top Layer w11: U2.33@1496.85,1234.21 1560.47,1234.21 ; 1560,1235 1570.16,1245.16 2140,1245.16 J1.B7@2232.24,1245.16 ; v1@2140,1285.09 J1.A7@2232.18,1285.09
  Bottom Layer w11: v1(2140,1245) v1(2140,1285)
D_P: J1.A6 J1.B6 U2.34 | length 940.8
  Top Layer w11: U2.34@1496.85,1253.9 1545,1253.9 ; 1545,1255 1555.16,1265.16 2070,1265.16 J1.A6 ; v1(2070,1304) 2090,1304 J1.B6@2232.18,1303.98
  Bottom Layer w11: v1(2070,1265) v1(2070,1304)
DC: 
DTR: 
EN: 
EP_CS: 
EP_RESET: 
GND: C1.1 C2.1 C3.1 C4.1 C5.1 C6.1 C7.2 C8.2 C9.2 C10.2 C11.1 C12.1 C13.1 C14.1 D4.1 D8.1 D9.1 GND.1 J1.A1_B12 J1.A12_B1 J2.5 J3.4 J4.2 J5.4 J5.5 J6.4 J7.2 J8.G1 J8.G2 R1.1 R4.1 R5.1 R8.1 R9.1 R10.2 U1.2 U2.5 U2.18 U2.35 U2.42 U3.4 U3.7 U4.2 U4.7 U4.8 U4.9 U5.1 U5.8 U5.10 U6.3 U6.8 U6.9 X1.2 X1.G1 | length 1831.6
  Top Layer w10: v1(281,1080) J8.G1@281,1104 ; J8.G2@282,1239 v1(282,1259) ; C14.1@315,786 v1(315,806) ; v1(344,945) U5.10@386,945 ; v1(920,1150) C4.1@945,1150 ; v1(920,1215) 950.72,1215 C9.2 ; v1(920,1280) C10.2@950,1280 ; v1(920,2285) C6.1@920,2310 ; U5.1@1018,469 1019,470 v1(1074,470) ; U5.8@1055,1025 v1(1075,1025) ; v1(1155,2996) GND.1@1187,2996 ; GND.1@1167,548 1167,543 1224.09,485.91 1247.09,485.91 v1(1249,484) 1275,484 R8.1@1276,485 ; C8.2@1235,855 v1(1235,875) ; C13.1@1260,3210 1264.69,3214.69 1295.69,3214.69 v1(1296,3215) ; C5.1@1310,845 1310,843.7 1313.7,840 v1(1333,840) ; v1(1329.5,3079) 1331.41,3080.91 1331.41,3092.41 U6.3@1334,3095 ; v1(1335,813) 1336.91,811.09 1336.91,798.09 U3.7@1340,795 ; U6.9@1356.65,3165.52 1356.65,3165.63 1365,3173.98 v1(1365,3175) U6.8@1375,3165 ; C7.2 v1(1446.53,1461) ; U3.4@1448,579 1448.93,579.93 1448.93,598.93 v1(1449,599) ; R9.1@1467.94,487 1468.94,486 v1(1492.94,486) ; X1.G1@1515,1505 v1(1535,1505) ; v1(1600,1395) 1600,1420 X1.2@1605,1425 ; v1(1690,684) 1690.54,684.54 U1.2@1690.54,714.46 ; U1.2 1691.07,751.07 1705,765 1768,765 1815.35,717.65 1818.3,717.65 R4.1 ; C2.1@1713,887 1716,890 v1(1716,911) ; C1.1@1713,959 1716,962 v1(1716,980) ; C3.1@1720,551 1721,550 v1(1742,550) ; v1(1730,3137) U4.9@1757,3137 ; U4.8 1745.42,3200.21 1745.42,3229.58 v1@1755,3239.16 ; v1(1755,3240) v1@1755,3239.16 ; U4.7@1764.45,3225 1764.45,3228.99 1755,3238.44 v1@1755,3239.16 ; v1(1865,3105) C12.1@1865,3130 ; v1(2040,1315) 2040,1331.3 2041.3,1331.3 R5.1@2050,1340 ; R1.1@2050,1196 2053.3,1196 2063,1186.3 v1(2063,1151) ; R10.2@2066,701 2067,700 v1(2067,674) ; v1(2198,1402) 2198.51,1401.49 2220.49,1401.49 J1.A12_B1@2222,1403 ; v1(2200,1150) 2200.49,1149.51 2233.49,1149.51 J1.A1_B12@2234,1149 ; J4.2@2239,887 v1(2271,887)
  Top Layer w11: v1(881,1955) 905.53,1955 C11.1@906.53,1954 ; v1(1025,2150) D4.1 ; v1@1103,1204 1114.16,1215.16 U2.5@1163.15,1215.16 ; v1(1158,1564) 1158,1498.27 D9.1@1159,1497.27 ; v1@1320.16,979 U2.18@1320.16,1007.16 ; U2.42@1339.84,1356.6 1339.84,1387.84 v1@1349,1397 ; v1@1407.4,1921.4 1407.8,1921 1457.54,1921 D8.1 ; U2.35@1498.85,1273.42 1531.42,1273.42 v1@1549,1291 ; U4.2@1764.84,3067.84 U4.9@1764.84,3141.15
  other v1: 1320.1,979.24 345,980 375,980 405,980 435,980 465,980 499,1000 323.79,1001.21 499,1030 324,1031 499.21,1059.79 324,1061 448,1081 478,1081 345.21,1082.21 448,1111 345,1112 323.79,1133.21 448,1141 1995,1151 2029,1151 2097,1151 2131,1151 324,1163 447.43,1171.57 1995,1185 324,1193 426.21,1192.79 1101,1203 345.21,1214.21 375,1214 405,1214 1723,1219 1757,1219 1791,1219 1825,1219 1859,1219 1893.4,1219.38 1927.4,1219.38 1961.4,1219.38 1995,1219 1592,1291 1626,1291 1726,1291 1760,1291 1794,1291 1828,1291 1862,1291 1896,1291 1930,1291 1964,1291 1998,1291 1548.05,1292.19 1998,1324 1998,1358 1998,1392 2032,1392 2066,1392 2100,1392 2134,1392 1350.05,1399.19 1407,1921
  other v3: 2355,525 961,1820 360,3248 2360,3250
  other v4: 2056,514
IO0: 
IO2: 
IO4: 
IO5: 
IO16: 
IO17: 
IO18: 
IO23: 
IRQ: 
LR_CS: 
LR_RESET: 
MISO: U2.21 U5.2 | length 819.5
  Top Layer w10: U5.2 1040.43,551.3 1099.13,610 v1(1388,610)
  Top Layer w11: U2.21@1379.21,1018.15 1379.21,970.79 v1@1390,960
  Bottom Layer w10: v1(1388,610) 1388.61,610.61 1388.61,958.51 v1(1389.21,959.11)
MOSI: U2.19 U5.3 | length 720.4
  Top Layer w10: U5.3 1009.96,635 v1(1307,635)
  Top Layer w11: v1(1333,946) 1339.84,952.84 1339.84,1018.15 U2.19@1339.84,1030.15
  Bottom Layer w10: v1(1307,635) 1306,636 1306,930.57 1319.54,944.11 1331.11,944.11 v1(1333,946)
NetC7_1: C7.1 U2.43 | length 126.3
  Top Layer w10: U2.43@1320.16,1341.85 1320.16,1351.85 1320.16,1406.16 C7.1@1364,1450
NetC9_1: C9.1 U2.2 Y1.1 | length 189.5
  Top Layer w11: C9.1 1045.45,1213.63 1068.85,1237.03 1068.85,1258.69 1075.16,1265 Y1.1 1093.58,1273.58 U2.2@1163.15,1273.58
NetC10_1: C10.1 U2.1 Y1.2 | length 205.8
  Top Layer w11: C10.1 1011.15,1313.67 1017.59,1320.12 Y1.2 1134.88,1320.12 1163.15,1291.85 U2.1@1163.15,1293.27
NetC15_2: 
NetC17_2: 
NetC22_1: 
NetC28_2: 
NetC29_2: 
NetC31_1: 
NetD2_2: D2.2 R4.2 | length 81.4
  Top Layer w11: R4.2 1833,764 D2.2@1913,764
NetD7_2: D7.2 R10.1 | length 72.2
  Top Layer w11: D7.2 2063.5,765.5 R10.1@2064,766
NetD11_2: 
NetD13_2: 
NetD14_2: 
NetD16_2: 
NetJ1_A5: J1.A5 R1.2 | length 131.3
  Top Layer w11: R1.2@2110,1200 2163,1200 2189,1226 ; 2190.99,1225.99 J1.A5@2232.53,1225.99
NetJ1_B5: J1.B5 R5.2 | length 125.2
  Top Layer w10: R5.2@2107,1343.9 J1.B5
NetJ8_1: J8.1 U5.9 | length 180.2
  Top Layer w10: J8.1 405,1170 414.45,1160.55 U5.9
NetJ18_A5: 
NetJ18_B5: 
NetJ22_1: 
NetL1_1: 
NetL1_2: 
NetQ1_2: 
NetQ2_2: 
NetQ5_2: 
NetQ6_2: 
NetR2_1: R2.1 U1.3 | length 90.5
  Top Layer w10: R2.1 1719.44,639.72 1719.44,660.84 1728.47,669.87 U1.3
NetR8_2: R8.2 U3.2 | length 70.4
  Top Layer w10: R8.2 1348.87,498.87 1348.87,550.87 U3.2@1352,554
NetR9_2: R9.2 U3.3 | length 66.9
  Top Layer w10: U3.3@1398,553 1398.87,552.13 1398.87,495.13 R9.2
NetR13_1: 
NetR18_1: 
NetR19_1: 
NetR23_2: 
NetR24_2: 
NetR26_2: 
NetR27_2: 
NetR28_2: 
NetR31_1: 
NetR33_1: 
NetR41_1: 
NetR42_1: 
NetR45_2: 
NetR46_2: 
NetR47_2: U4.6
RAIN: C6.2 D3.1 D4.2 J3.3 R3.1 U2.29 | length 2140
  Top Layer w10: 803,2515.2 R3.1@919.8,2515.2 ; C6.2 1014.53,2374.53 D4.2@1015,2375 ; R3.1 1015,2515 D4.2@1015,2375 ; D4.2@1015,2372 D4.2@1015,2375 ; D4.2@1016.26,2373.27 1017.57,2371.96 v1(1089.96,2371.96)
  Top Layer w11: U2.29@1496.85,1155.47 1539.53,1155.47 v1@1556,1139
  Bottom Layer w10: v1(1089.96,2371.96) 1199,2262.92 1199,1322 1231,1290 1417.84,1290 1433.74,1274.1 1433.74,1273.87 1454.81,1252.8 1454.81,1218.19 1535,1138 v1@1557,1138
  other v1: 1555.63,1138.31
RESET: U2.40 X1.1 | length 225.5
  Top Layer w10: U2.40@1379.21,1351.85 1379.21,1414.21 1385,1420 X1.1@1540,1420
RTS: 
SCK: U2.20 U5.4 | length 669.3
  Top Layer w10: U5.4 1008.78,705 v1(1360,705)
  Top Layer w11: v1@1359.53,920 U2.20@1359.53,1018.15
  Bottom Layer w11: v1@1359.53,705 1360.5,705.97 1360.5,918.5 v1(1360,919)
SCL: J2.3 R11.1 SCL.1 U2.32 U3.6 U4.4 U6.2 | length 4053
  Top Layer w10: U6.2@1323.99,3119.9 1321.5,3119.9 1321.19,3119.59 1309.86,3119.59 1304,3113.73 1304,3062 1335,3031 1335,2935 1376,2894 v1(1745,2894) ; R11.1@1730,1175 v1(1755,1175)
  Top Layer w11: U3.6 1398.87,726.13 1405,720 1479.14,720 1485,725.86 1485,880 1690,1085 1690,1150 1701.8,1161.8 1711.8,1161.8 R11.1 1685,1215 ; U2.32@1496.85,1214.53 1684.72,1214.53 ; v1(1692.02,1290.66) 1693.74,1292.38 1693.74,1295.88 1694,1296.14 1694,1719 1805,1830 1905,1830 2043.56,1830 2050,1836.44 2050,2009 1805,2254 1805,2826 ; v1(1805,2895) 1805,2826 ; v1@1805,2895.86 U4.4@1805,3071.77 ; SCL.1 1805,2826
  Bottom Layer w10: v1@1692,1290.64 1692,1213 1730,1175 v1(1755,1175) ; v1(1745,2894) 1745.5,2894.5 1804.5,2894.5 v1(1805,2895)
SDA: J2.4 R12.1 SDA.1 U2.31 U3.5 U4.1 U6.4 | length 3521.6
  Top Layer w10: R12.1@1660,1180 v1(1680,1180) ; SDA.1 1775,2826
  Top Layer w11: U6.4 1355,3058.99 1355.5,3058.49 1355.5,2969.5 1405,2920 1775,2920 ; U3.5 1448.87,923.87 1615,1090 1615,1158.38 1621.44,1164.82 1639.82,1164.82 R12.1 1629.93,1195.02 U2.31@1496.85,1194.84 ; v1(1660,1290.66) 1660,1735 1775,1850 ; U4.1@1745,3075.17 1745,3035 1775,3005 1775,2920 ; J2.4@2010,1880 1805,1880 1775,1850 ; 1775,1850 1775,2826 1775,2920
  Bottom Layer w10: v1(1660,1290.66) 1660,1264.66 1664,1260.66 1664,1198.71 1680,1182.71 v1(1680,1180)
SWCLK: J6.2 U2.45 | length 1622
  Top Layer w11: U2.45@1280.16,1351.85 1280.16,1388.4 ; 1280.15,1384.54 v1@1280.15,1453
  Bottom Layer w10: v1(1280,1454) 2166,2340 J6.2 J6.2@2430,2340
SWDIO: J6.3 U2.46 | length 1708.6
  Top Layer w10: v1@1256,1410 1261.16,1404.84 U2.46@1261.16,1337.85
  Bottom Layer w11: v1(1254,1410) 1254.5,1410.5 1254.5,1464.56 2229.94,2440 J6.3 J6.3@2430,2440
U0RX: 
U0TX: 
VBATT: 
VBUS: C3.2 D1.2 J1.A4_B9 J1.B4_A9 R2.2 U1.1 | length 338.3
  Top Layer w10: D1.2@1646,461 D1.2@1648,459 ; v1(2192.62,1180.81) v1@2192.77,1180.66 ; J1.A4_B9@2219.34,1180.66 J1.A4_B9@2220,1180
  Top Layer w20: D1.2 1645.94,540.94 C3.2@1655,550 ; D1.2@1648,459 v1(1681,459) ; C3.2 1653.14,632.47 R2.2 U1.1 ; v1@2192,1369 2212.73,1369 J1.B4_A9@2211.99,1369.74 ; v1@2192.77,1180.66 J1.A4_B9@2219.34,1180.66
  other v1: 2191.36,1369.88
VBUSS: 
VDD3V: 
VDD5V: 
VIN: D1.1 J4.1 J7.1 | length 69.4
  Top Layer w10: D1.1@1772,464 1773,463 v1(1799,463) ; J4.1@2232,810 v1(2274,810)
VLVL: 
WDIR: D5.1 D8.2 J5.2 R6.1 U2.7 | length 1959.6
  Top Layer w11: J5.2@675,1779 675,1966 764,2055 1276,2055 1293,2038 ; v1(1076,1351.93) 1103.93,1351.93 1294,1542 D5.1 ; v1@1104,1130 1104,1145 1134.16,1175.16 U2.7@1157.15,1175.16 ; U2.7@1163.15,1175.16 U2.7@1168.15,1175.16 ; 1292.6,2037.4 1292.6,1919.4 D8.2 ; R6.1@1293.54,1813.4 D8.2@1293.54,1917.54 ; D5.1@1293.6,1708.4 R6.1@1293.6,1812.65
  Bottom Layer w11: v1(1076,1351.93) 1075,1350.93 1075,1158 v1(1103,1130)
WSPEED: C11.2 D6.1 D9.2 J5.3 R7.1 U2.30 | length 2212.2
  Top Layer w10: J5.3@756.35,1719 J5.3@765.35,1728 ; J5.3@774,1730.2 861.8,1730.2 914,1678 R7.1 900.35,1682.65 723.57,1682.65 717.72,1688.5 717.72,1893.72 840,2016 D6.1@1133,2016 ; J5.3@774.9,1727.9 J5.3 ; R7.1@918.61,1666 1107.47,1666
  Top Layer w11: D9.2 1159,1665.03 1180.03,1644 v1(1239,1644) ; U2.30@1496.85,1175.16 1574.84,1175.16 v1(1585,1165)
  Bottom Layer w11: v1@1238.09,1643.91 1239,1643 1239,1525.75 1228.5,1515.25 1228.5,1349.94 1238.44,1340 1440,1340 1480,1300 1480,1225 1530,1175 1575.51,1175 1585,1165.51 v1(1585,1165)
pads on no net: J1.A8 J1.B8 J1.SH1 J1.SH2 J1.SH3 J1.SH4 J2. J2.1 J2.6 J3. J3.1 J3.2 J3.5 J3.6 J4.3 J4.4 J5. J5.1 J5.6 U1.4 U2.3 U2.8 U2.9 U2.10 U2.12 U2.15 U2.16 U2.22 U2.23 U2.24 U2.25 U2.27 U2.28 U2.37 U2.38 U2.39 U2.41 U2.47 U2.48 U2.49 U3.1 U4.3 U5.7 U5.11 U5.12 U5.15 U5.16 U6.7 X1.3 X1.4
copper on no net:
  other v2: 1251.11,1106.1 1290.48,1106.1 1329.85,1106.1 1369.22,1106.1 1408.59,1106.1 1251.11,1145.47 1290.48,1145.47 1329.85,1145.47 1369.22,1145.47 1408.59,1145.47 1251.11,1184.84 1290.48,1184.84 1329.85,1184.84 1369.22,1184.84 1408.59,1184.84 1251.11,1224.21 1290.48,1224.21 1329.85,1224.21 1369.22,1224.21 1408.59,1224.21 1251.11,1263.58 1290.48,1263.58 1329.85,1263.58 1369.22,1263.58 1408.59,1263.58

## Polygon pours and split planes (outlines as drawn)
VIN on VCC "VIN_L03_P001" (solid, pour order 1): 1735,439.26 1735,494.23 1734.11,495.12 1734.96,495.96 1848.33,495.96 1848.33,1009.53 1879.64,1040.84 2101.31,1040.84 2124.15,1018 2124.15,864.01 2140.23,847.93 2298.45,847.93 2298.45,771.79 2278.99,752.33 2142.77,752.33 2141.92,753.17 1921.94,753.17 1919.4,750.63 1919.4,440.69
+3V3 on VCC "+3V3_L03_P002" (solid, pour order 2): 200.54,395 2478,395 2478,3380 240,3380 200.54,3340.54
VBUS on VCC "VBUS_L03_P000" (solid, pour order 0): 2235,1380 2235,1165 2185,1165 2185,1050 1875,1050 1835,1010 1835,515 1735,515 1700,480 1700,440 1610,440 1610,585 1620,595 1755,595 1755,1040 1840,1125 2120,1125 2165,1170 2165,1380
no net on Bottom Layer "NONET_L04_P008" (solid, pour order 8): 200.54,395 2474.99,395 2489.99,3380 245,3380 200.54,3335.54
GND on GND "GND_L02_P003" (solid, pour order 3): 200.54,395 2477,395 2477,3380 245,3380 200.54,3335.54
no net on Top Layer "NONET_L01_P006" (solid, pour order 6): 200.54,395 2468.98,395 2483.98,3380 245,3380 200.54,3335.54

## Keep-outs
Keep-Out Layer:
  pour cut-out: 1303.71,2996.08 ccw(c1305.13,3000.89) 1310.14,3000.89 ccw(c1305.13,3000.89) 1306.55,3005.7 cw(c1350.96,3156.1) 1507.79,3156.1 cw(c1350.96,3156.1) 1403.97,3008.51 ccw(c1405.38,3003.69) 1406.8,2998.87 ccw(c1350.96,3156.1) 1517.82,3156.1 ccw(c1350.96,3156.1)
  lines w20: 1305.13,3000.89 cw(c1350.96,3156.1) 1405.46,3003.71 ; 1744.71,2997.95 cw(c1790.54,3153.16) 1836.04,2997.85

## Silkscreen, mask and mechanical layers (free items; w line width, h text height)
Top Overlay:
  drawing of 479 lines, arcs and shapes, not listed
  text "TEMP/HUM" at 1625,2921 h40
  text "BAR PESS" at 1220,2920 h40
  text "RAIN" at 670,2780 h40
  text "GND" at 2227,2525 h39.37
  text "SWDIO" at 2157,2425 h39.37
  text "SWCLK" at 2152,2320 h39.37
  text "3.3" at 2237,2220 h39.37
  text "SOLAR RAD" at 1860,2135 h40
  text "WIND" at 654,1982 h40
  text "D13" at 1829,804 h35
  text "ON" at 2106,716 h35

## Text inside footprints (layer, text, board x,y; h text height)
J2: Mechanical 13 "PCB EDGE" at 2486.15,1930.09 h19.71 r180
J3: Mechanical 13 "PCB EDGE" at 195.85,2424.91 h19.71
J5: Mechanical 13 "PCB EDGE" at 193.85,1627.71 h19.71
J7: Top Overlay "+      -" at 1967.78,981 h60 r270
U6: Top Overlay "*" at 1301.3,3131.9 h15